# Altium PCB Micron-6.PcbDoc
Units mm, origin at the board's own origin, x right, y up, seen from the top; angles counter-clockwise.
Board outline 45.2 x 23.2 mm, 2 copper layers (Top Layer, Bottom Layer), stack 1.021 mm thick; 73 components, 55 nets, 245 pads, 114 vias.
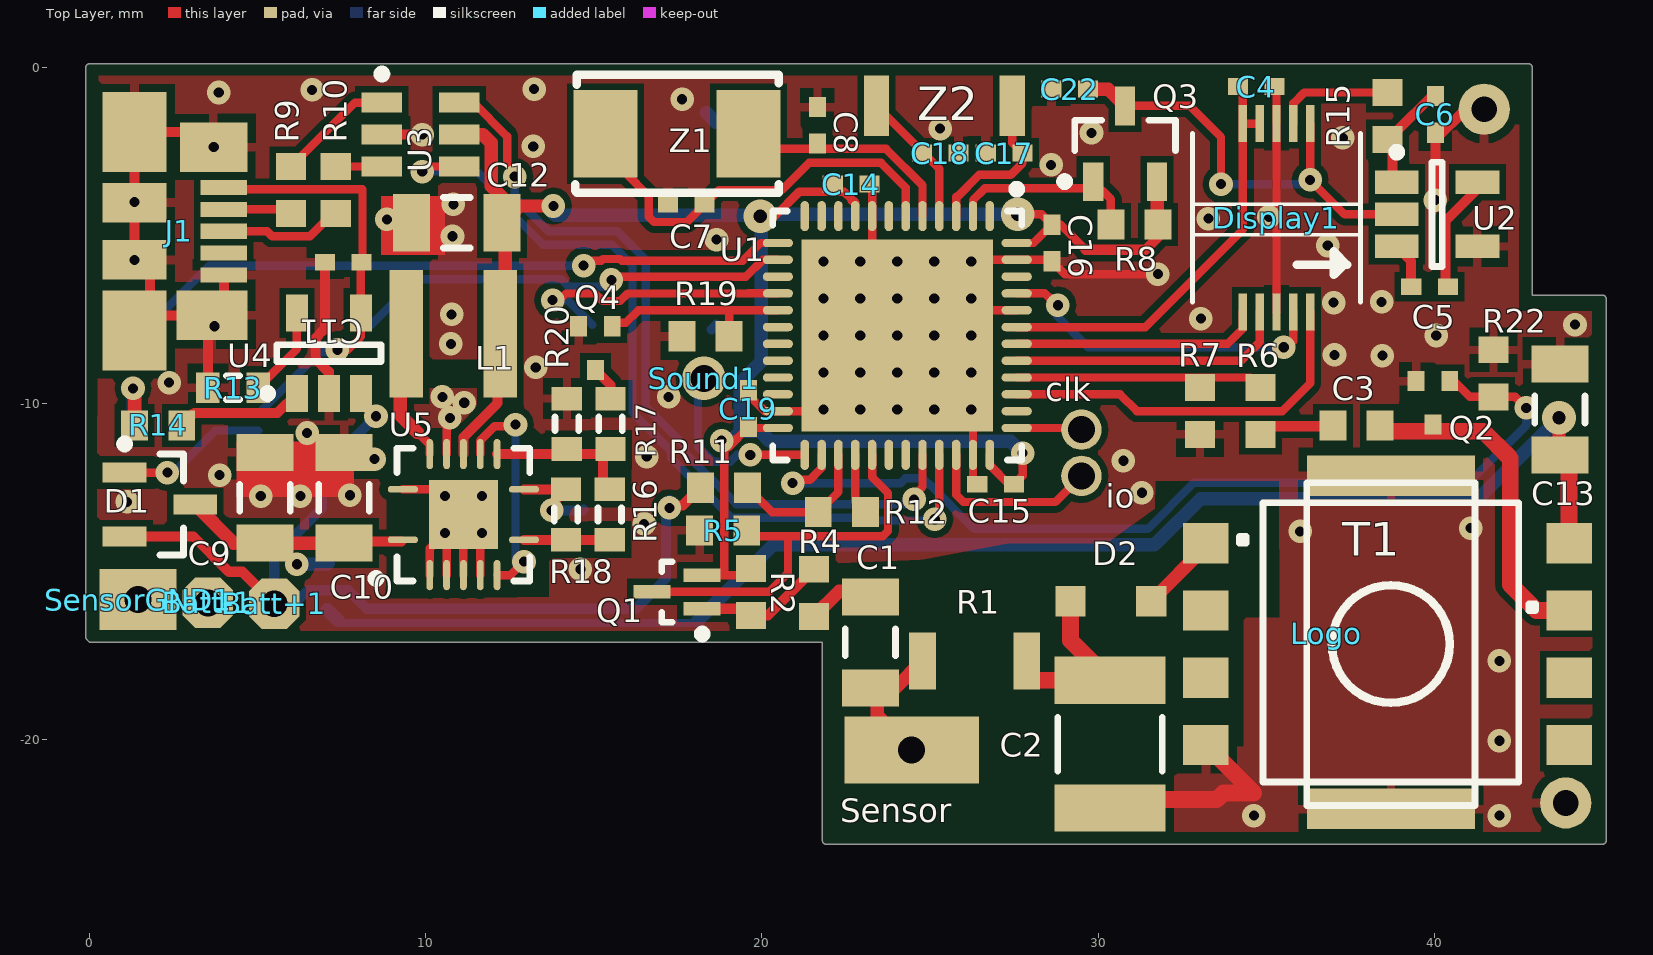
[diagram p0: Top Layer view]
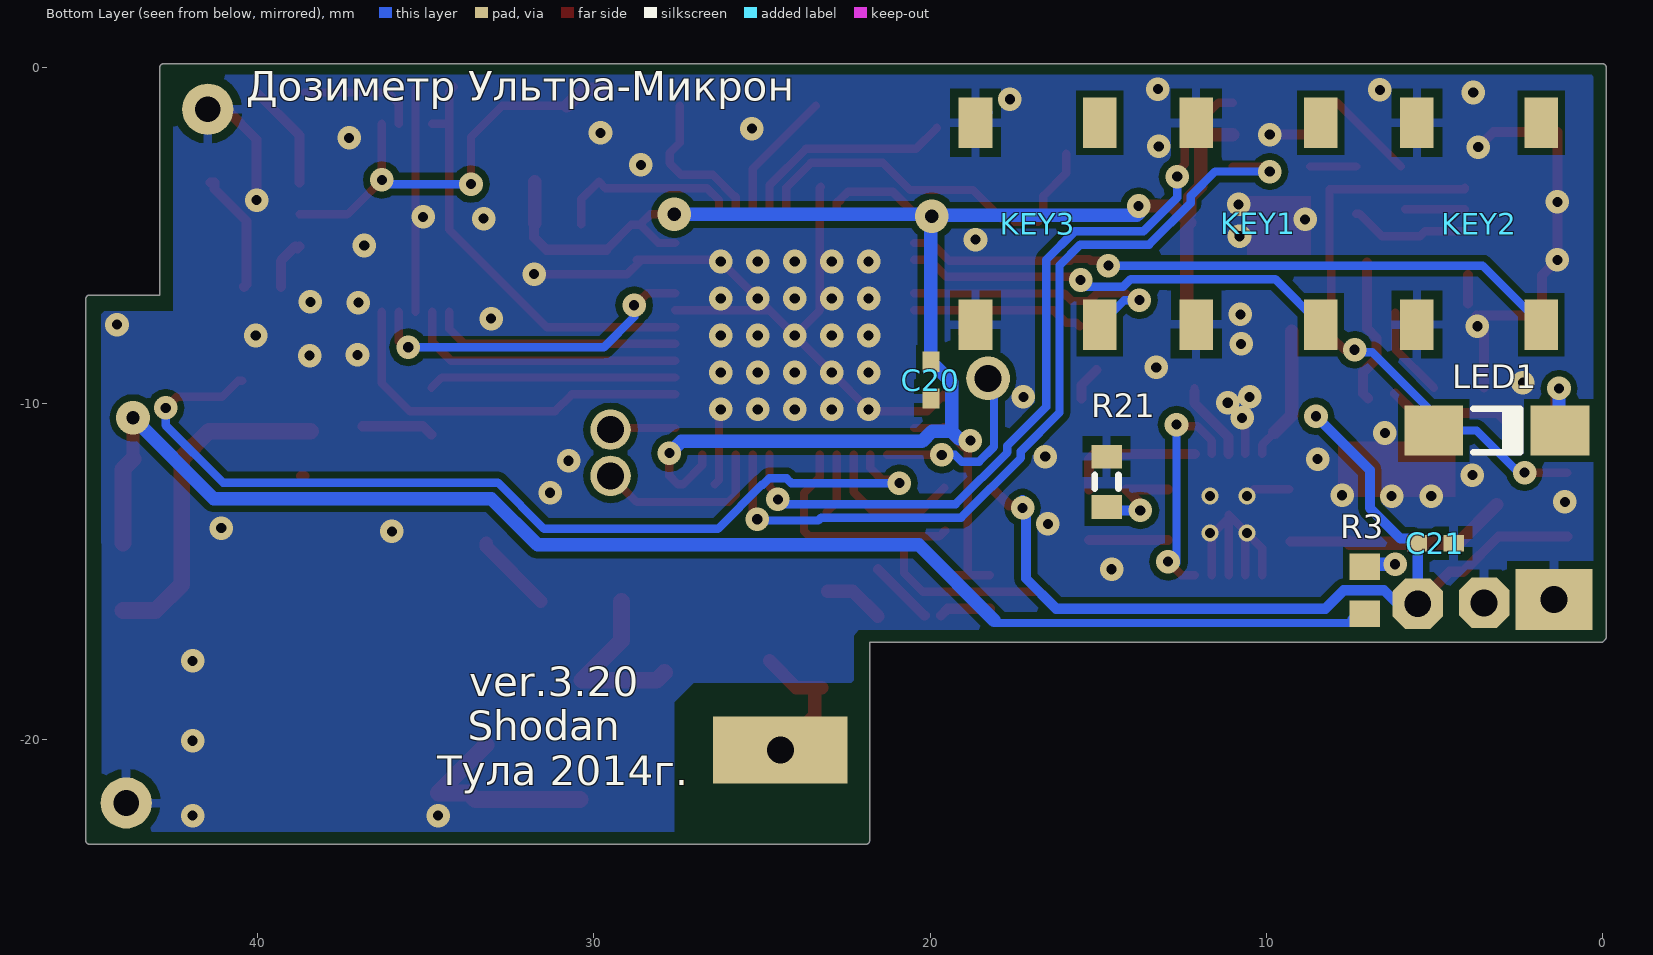
[diagram p1: Bottom Layer view, seen from below]

## Layer stack, top to bottom
Top Solder: solder mask 0.0102, Solder Resist, Dk 3.5
Top Layer: signal copper 0.0356
Dielectric1: dielectric 0.95, FR-4, Dk 4.8
Bottom Layer: signal copper 0.0356
Bottom Solder: solder mask 0.0102, Solder Resist, Dk 3.5

## Board outline
21.8,-23 21.8,-17.1 0.05,-17.1 cw(c0.05,-17) -0.021,-17.071 -0.071,-17.021 cw(c0,-16.95) -0.1,-16.95 -0.1,0 cw(c0,0) 0,0.1 42.775,0.1 cw(c42.775,0) 42.788,0.1 42.787,0.1 cw(c42.8,0) 42.9,0 42.9,-6.775 44.95,-6.775 cw(c44.95,-6.875) 44.975,-6.778 cw(c45,-6.875) 45.1,-6.875 45.1,-23 cw(c45,-23) 45,-23.1 21.9,-23.1 cw(c21.9,-23)

## Design rules (kind name [scope] priority, off if disabled: settings)
Clearance Clearance_poly [InPolygon] p1: gap=0.2
Clearance [All] p2: gap=0.15
ComponentClearance [All] p1: gap=0.1 collisioncheckmode=3 verticalgap=0.254 showdistances=TRUE
HoleSize [All] p1: absolutevalues=TRUE maxlimit=2.54 minlimit=0.3 maxpercent=80.000 minpercent=20.000
HoleToHoleClearance [All] p1: gap=0.152 allowstackedmicrovias=TRUE
MinimumAnnularRing [All] p1: minimumring=0.2
MinimumSolderMaskSliver [All] p1: minsoldermaskwidth=0.152
PlaneClearance [All] p1: clearance=2
PlaneConnect [All] p1: planeconnectstyle=Relief reliefexpansion=0.457 reliefentries=4 reliefconductorwidth=0.3 reliefairgap=0.457
PolygonConnect PolygonConnect_via [IsVia] p1: connectstyle=Direct reliefconductorwidth=0.254 reliefentries=4 polygonreliefangle="90 Angle" airgapwidth=0.254
PolygonConnect [All] p2: connectstyle=Relief reliefconductorwidth=0.254 reliefentries=4 polygonreliefangle="90 Angle" airgapwidth=0.254
RoutingVias [All] p1: holewidth=0.3 width=0.62 viastyle="Through Hole" minholewidth=0.3 minwidth=0.62 maxholewidth=6 maxwidth=4
ShortCircuit ShortCircuit_1 [All] p1: allowed=FALSE
ShortCircuit [All] p2: allowed=FALSE
SilkToSilkClearance [All] p1: silktosilkclearance=0.152
SilkToSolderMaskClearance SilkscreenOverComponentPads [IsPad] p1: minsilkscreentomaskgap=0.1 clearancetoexposedcopper=TRUE
SolderMaskExpansion [All] p1: expansion=0.1
UnpouredPolygon [All] p1: allowunpoured=FALSE
Width [All] p1: maxlimit=2.254 minlimit=0.25 preferedwidth=0.4
20 further rules are at their usual default settings.

## Components (designator, comment, footprint, x,y, rotation, side; value= is the part's Value field where it differs from the comment)
Batt+1 "" "Sensor contact"#1 5.125,-17.725 r90 top
Batt-1 "" "Sensor contact"#2 3.525,-15.925 r90 top
C1 "10pF" C1206 23.225,-17.1 r270 top
C2 "10nF 1000V" 1812 30.35,-20.125 r90 top
C3 "100nF" 1608[0603] 37.675,-10.65 r0 top
C4 "100nF" "0402 AVX" 34.7,-0.575 r90 top
C5 "1uF" "0402 AVX" 39.85,-6.525 r270 top
C6 "1uF" "0402 AVX" 40.025,-1.4 r180 top
C7 "18pF" "0402 AVX" 17.75,-4.075 r90 top
C8 "18pF" "0402 AVX" 21.65,-1.725 r180 top
C9 "4u7" C1206 5.225,-12.8 r270 top
C10 "100nF" C1206 7.575,-12.8 r270 top
C11 "1uF" "0402 AVX" 7.55,-5.8 r90 top
C12 "22uF" C1206 10.925,-4.625 r0 top
C13 "10uF" C1206 43.725,-10.175 r270 top
C14 "100nF" "0402 AVX" 22.65,-3.475 r90 top
C15 "100nF" "0402 AVX" 26.95,-12.4 r270 top
C16 "100nF" "0402 AVX" 28.625,-5.225 r0 top
C17 "10pF" "0402 AVX" 27.2,-2.55 r90 top
C18 "10pF" "0402 AVX" 25.3,-2.55 r270 top
C19 "100nF" "0402 AVX" 19.6,-10.15 r180 top
C20 "1uF" "0402 AVX" 19.975,-9.3 r180 bottom
C21 "1uF" "0402 AVX" 4.975,-14.15 r270 bottom
C22 "100nF" "0402 AVX" 29.15,-0.65 r270 top
clk "" "Sensor contact"#3 29.5,-10.775 r90 top
D1 "PMEG4005CT" SOT23_N 2.1,-13 r0 top
D2 "DA2JF8100L" DA2JF8100L 31.575,-15.875 r180 top
Display1 "Nokia 2760" DF23C-10DS-0.5V 32.8,-1.875 r90 top locked
io "" "Sensor contact"#3 29.5,-12.15 r90 top
J1 "Micro-USB" 47346-0001 4.75,-4.875 r270 top
KEY1 "Menu" IT-1187-160GM-G 12.087,-1.65 r270 bottom locked
KEY2 "UP" IT-1187-160GM-G 5.525,-1.65 r270 bottom locked
KEY3 "DOWN" IT-1187-160GM-G 18.65,-1.65 r270 bottom locked
L1 "10uH" IFSC1515AHER100M01 12.725,-9.825 r180 top
LED1 "KPTD-3216SECK" KPTD-3216SECK 3.15,-10.8 r0 bottom
Logo "" "Logo Micron" 36.775,-16.85 r0 top
Q1 "BC857CT" SOT416_N 17.475,-15.6 r180 top
Q2 "PMR400UN" PMR400UN 39.95,-9.325 r90 top
Q3 "IRLML6401" Micro3_N 30.8,-2.275 r90 top
Q4 "PMR400UN" PMR400UN 15.05,-7.7 r90 top
R1 "10M" "Yageo HV 1206" 26.325,-17.65 r0 top
R2 "10k" 1608[0603] 19.675,-15.6 r270 top
R3 "22R" 1608[0603] 7.075,-15.55 r270 bottom
R4 "1.5K" 1608[0603] 21.55,-15.625 r90 top
R5 "10k" 1608[0603] 18.85,-13.775 r180 top
R6 "10k" 1608[0603] 34.825,-10.225 r90 top
R7 "1k" 1608[0603] 33.025,-10.225 r90 top
R8 "10k" 1608[0603] 31.075,-4.675 r0 top
R9 "22R" 1608[0603] 6,-3.65 r270 top
R10 "22R" 1608[0603] 7.325,-3.65 r270 top
R11 "10K" 1608[0603] 18.875,-12.5 r180 top
R12 "10K" 1608[0603] 22.375,-13.225 r180 top
R13 "62K" J1-0603 4.275,-9.525 r0 top
R14 "470R" 1608[0603] 2.05,-10.65 r180 top
R15 "22R" 1608[0603] 38.6,-1.45 r270 top
R16 "1.6M" J1-0603 15.475,-13.3 r90 top
R17 "1.6M" J1-0603 15.5,-10.6 r270 top
R18 "3M" J1-0603 14.175,-13.3 r270 top
R19 "100k" 1608[0603] 18.325,-8 r0 top
R20 "3.3M" J1-0603 14.2,-10.6 r90 top
R21 "2.2M" J1-0603 14.75,-12.325 r90 bottom
R22 "100k" 1608[0603] 41.75,-9.1 r90 top
Sensor "" "Sensor contact"#4 24.45,-20.3 r180 top
SensorGND1 "" "Sensor contact"#5 1.45,-15.825 r180 top
Sound1 "" "Sensor contact"#6 18.275,-9.25 r90 top
T1 "Epcos ER9.5/5 10, d0.150 / 300, d0.063" "Epcos ER9.5/5" 33.2,-20.15 r0 top
U1 "STM32L152CBU6" UFQFPN48_M 24.025,-7.975 r270 top
U2 "TPS60400DBV" SOT-23-OT5_M 40.075,-4.375 r0 top
U3 "USBLC6-2" SOT23-6L 9.85,-2 r0 top
U4 "MCP73831T-2ACI/OT" SOT-23-OT5_N 7.125,-8.5 r90 top
U5 "TPS62736RGYT" TPS62736RGYT 11.125,-13.3 r0 top
Z1 "8MHZ" 8MHZ 16.9,-1.875 r180 top
Z2 "32,768 KHz" ABS10 22.975,-0.25 r0 top

## Footprints (in the part's own frame and the unit in brackets; to place one, negate y for a bottom-side part, rotate by r counter-clockwise, add the part's x,y. Pads: shape width x height; smd on the part's side, far side on the other; paste and mask are expansions set on the pad)
8MHZ [mm]
  rect 1.9x2.6 smd: 1(-2.7,0.1) 2(1.55,0.1)
  silkscreen extent -3.6,-1.65 2.45,1.85, body extent -3.6,-1.65 2.4,1.85, height 1.4
"0402 AVX" [mm]
  rect 0.5x0.6 smd: 1(0,0.545) 2(0,-0.545)
  body extent -0.25,-0.48 0.25,0.52, height 0.56
1608[0603] [mm] "Chip Capacitor, Body 1.6x0.8mm, IPC High Density"
  rect 0.8x0.9 smd: 1(-0.7,0) 2(0.7,0)
  body extent -0.87,-0.48 0.87,0.48, height 1.3
1812 [mm] "Chip Capacitor, Body 4.5x3.2mm, IPC High Density"
  rect 1.4x3.3 smd: 1(-1.9,0) 2(1.9,0)
  silkscreen extent -0.8,-1.55 0.8,1.55, body extent -2.4,-1.7 2.4,1.7, height 1.4
47346-0001 [mm] "Molex Mico-USB"
  rect 0.45x1.38 smd: 1(-1.3,-0.75) 2(-0.65,-0.75) 3(0,-0.75) 4(0.65,-0.75) 5(1.3,-0.75)
  rect 1.475x2 smd: MH1(-2.5,-1.05)
  rect 1.475x2.1 smd: MH2(2.5,-1.1)
  rect 2.375x1.9 smd: MH3(-2.95,-3.4) MH4(2.95,-3.4)
  rect 1.175x1.9 smd: MH3(-0.85,-3.4) MH4(0.85,-3.4)
  body extent -3.95,-5.52 4.03,-0.09, height 2.77
ABS10 [mm]
  rect 0.75x1.8 smd: 1(0.43,-0.9) 2(4.47,-0.9)
  body extent 0,-1.8 4.9,0, height 1
C1206 [mm] "Chip Capacitor, Body 3.2x1.6mm, IPC High Density"
  rect 1.1x1.7 smd: 1(-1.35,0) 2(1.35,0)
  silkscreen extent -0.4,-0.75 0.4,0.75, body extent -1.7,-0.9 1.7,0.9, height 1.3
DA2JF8100L [mm]
  rect 0.9x0.9 smd: 1(0,0) 2(2.4,0)
  body extent 0.36,-0.65 2.06,0.6, height 0.7
DF23C-10DS-0.5V [mm]
  rect 1.1x0.25 smd: 1(-5.4,-1.5) 2(-5.4,-2) 3(-5.4,-2.5) 4(-5.4,-3) 5(-5.4,-3.5) 6(0.2,-3.5) 7(0.2,-3) 8(0.2,-2.5) 9(0.2,-2) 10(0.2,-1.5)
  silkscreen extent -5.1,-5 -0.1,0, body extent -5.1,-5 -0.1,0, height 1.4
"Epcos ER9.5/5" [mm]
  rect 1.35x1.2 smd: 1(0,6) 2(0,4) 3(0,2) 4(0,0) 5(10.8,6) 6(10.8,4) 7(10.8,2) 8(10.8,0)
  rect 5x1.2 smd: GND(5.5,-1.9) GND(5.5,8)
  silkscreen extent 1,-1.8 9.8,7.8, body extent -0.4,-1.2 11.2,7.3, height 4.45
IFSC1515AHER100M01 [mm]
  rect 1x3.8 smd: 1(0.5,-1.9) 2(3.3,-1.9)
  body extent 0,-3.8 3.8,0, height 1.8
IT-1187-160GM-G [mm]
  rect 1.5x1 smd: 3(0,0) 3(6,0) 4(0,3.7) 4(6,3.7)
  body extent 0.4,-0.7 5.6,4.5, height 1.5
J1-0603 [mm] "Chip Resistor, Body 1.6x0.8mm, IPC High Density"
  rect 0.7x0.9 smd: 1(-0.75,0) 2(0.75,0)
  silkscreen extent -0.2,-0.35 0.2,0.35, body extent -0.85,-0.48 0.85,0.48, height 0.9
KPTD-3216SECK [mm] "Chip Capacitor, 2-Leads, Body 3,2x1,6mm, IPC Medium Density"
  rect 1.75x1.5 smd: 1(-1.875,0) 2(1.875,0)
  silkscreen extent -0.7,-0.65 0.7,0.65, body extent -1.6,-0.8 1.6,0.8, height 1.8
"Logo Micron" [mm]
Micro3_N [mm] "SOT23, 3-Leads, Body 2.9x1.3mm, Pitch 0.95mm, Lead Span 2.3mm, IPC Medium Density"
  rect 1.15x0.6 smd: 1(-1.125,0.95) 2(-1.125,-0.95) 3(1.125,0)
  silkscreen extent -1.25,-1.5 0.7,1.92, body extent -0.7,-1.5 0.7,1.5, height 1.12
PMR400UN [mm]
  rect 0.6x0.5 smd: 1(0,-0.5) 2(0,0.5) 3(-1.3,0)
  body extent -1.15,-0.9 -0.25,0.9, height 0.95
"Sensor contact"#1 [mm]
  oct 1.5x1.5 hole 0.8: 1(1.775,-0.375)
"Sensor contact"#2 [mm]
  oct 1.5x1.5 hole 0.8: 1(0,0)
"Sensor contact"#3 [mm]
  round 1.2 hole 0.8: 1(0,0)
"Sensor contact"#4 [mm]
  rect 4x2 hole 0.8: 1(0,0)
"Sensor contact"#5 [mm]
  rect 2.3x1.8 hole 0.8: 1(0,0)
"Sensor contact"#6 [mm]
  round 1.3 hole 0.8: 1(0,0)
SOT23-6L [mm]
  rect 1.2x0.6 smd: 1(-1.15,0.95) 2(-1.15,0) 3(-1.15,-0.95) 4(1.15,-0.95) 5(1.15,0) 6(1.15,0.95)
  silkscreen extent -1.27,1.68 -1.02,1.92, body extent -0.75,-1.52 0.75,1.53, height 1.45
SOT23_N [mm] "SOT23, 3-Leads, Body 2.9x1.3mm, Pitch 0.95mm, Lead Span 2.3mm, IPC Medium Density"
  rect 1.3x0.6 smd: 1(-1.05,0.95) 2(-1.05,-0.95) 3(1.05,0)
  silkscreen extent -1.17,-1.5 0.7,1.92, body extent -0.7,-1.5 0.7,1.5, height 1.1
SOT416_N [mm] "SOT416, 3-Leads, Body 1.6x0.8mm, Pitch 0.50mm, Lead Span 1.6mm, IPC Medium Density"
  rect 1.1x0.4 smd: 1(-0.75,0.5) 2(-0.75,-0.5) 3(0.75,0)
  silkscreen extent -0.87,-0.9 0.45,1.37, body extent -0.45,-0.9 0.45,0.9, height 0.95
SOT-23-OT5_M [mm] "SOT23, 5-Leads, Body 2.9x1.6mm, Pitch 0.95mm, Lead Span 2.7mm, IPC Low Density"
  rect 1.3x0.7 smd: 1(-1.2,0.95) 2(-1.2,0) 3(-1.2,-0.95) 4(1.2,-0.95) 5(1.2,0.95)
  silkscreen extent -1.32,-1.55 0.15,1.97, body extent -0.9,-1.55 0.9,1.55, height 1.45
SOT-23-OT5_N [mm] "SOT23, 5-Leads, Body 2.9x1.6mm, Pitch 0.95mm, Lead Span 2.7mm, IPC Medium Density"
  rect 1.1x0.65 smd: 1(-1.2,0.95) 2(-1.2,0) 3(-1.2,-0.95) 4(1.2,-0.95) 5(1.2,0.95)
  silkscreen extent -1.32,-1.55 0.25,1.95, body extent -0.9,-1.55 0.9,1.55, height 1.45
TPS62736RGYT [mm] "QFN, 18-Leads, Body 3,50x3,50mm, Pitch 0,50mm, Thermal Pad 2,05x2,05mm, IPC Low Density"
  oval 0.9x0.2 smd: 1(-1.8,-0.75) 7(1.8,-0.75) 8(1.8,0.75) 14(-1.8,0.75)
  oval 0.2x0.9 smd: 2(-1,-1.8) 3(-0.5,-1.8) 4(0,-1.8) 5(0.5,-1.8) 6(1,-1.8) 9(1,1.8) 10(0.5,1.8) 11(0,1.8) 12(-0.5,1.8) 13(-1,1.8)
  rect 2.05x2.05 smd: 15(0,0)
  silkscreen extent -2.72,-2.02 1.97,1.97, body extent -1.83,-1.83 1.83,1.83, height 1
UFQFPN48_M [mm] "QFN, 48-Leads, Body 7x7mm, Pitch 0.5mm, Thermal Pad 5.6x5.6mm, IPC Low Density"
  oval 0.9x0.25 smd: 1(-3.55,2.75) 2(-3.55,2.25) 3(-3.55,1.75) 4(-3.55,1.25) 5(-3.55,0.75) 6(-3.55,0.25) 7(-3.55,-0.25) 8(-3.55,-0.75) 9(-3.55,-1.25) 10(-3.55,-1.75) 11(-3.55,-2.25) 12(-3.55,-2.75) 25(3.55,-2.75) 26(3.55,-2.25) 27(3.55,-1.75) 28(3.55,-1.25) 29(3.55,-0.75) 30(3.55,-0.25) 31(3.55,0.25) 32(3.55,0.75) 33(3.55,1.25) 34(3.55,1.75) 35(3.55,2.25) 36(3.55,2.75)
  oval 0.25x0.9 smd: 13(-2.75,-3.55) 14(-2.25,-3.55) 15(-1.75,-3.55) 16(-1.25,-3.55) 17(-0.75,-3.55) 18(-0.25,-3.55) 19(0.25,-3.55) 20(0.75,-3.55) 21(1.25,-3.55) 22(1.75,-3.55) 23(2.25,-3.55) 24(2.75,-3.55) 37(2.75,3.55) 38(2.25,3.55) 39(1.75,3.55) 40(1.25,3.55) 41(0.75,3.55) 42(0.25,3.55) 43(-0.25,3.55) 44(-0.75,3.55) 45(-1.25,3.55) 46(-1.75,3.55) 47(-2.25,3.55) 48(-2.75,3.55)
  rect 5.7x5.7 smd: 49(0,0)
  silkscreen extent -4.47,-3.7 3.7,3.7, body extent -3.55,-3.55 3.55,3.55, height 0.6
"Yageo HV 1206" [mm]
  rect 0.8x1.7 smd: 1(-1.55,0) 2(1.55,0)
  body extent -1.6,-0.8 1.5,0.8, height 0.6

## Part data
Batt+1 Batt-1 clk io Logo Sensor SensorGND1 Sound1: library part Plug, "Plug"
C1 C2 C3 C4 C5 C6 C7 C8 C11 C13 C14 C15 C16 C17 C18 C19 C20 C21 C22: library part "Cap Semi", "Capacitor (Semiconductor SIM Model)"
C9 C10 C12: library part CAPACITOR, "Capacitor (Semiconductor SIM Model)"
D1: library part BAT54C, "Schottky Barrier Double Diode"
D2: library part Diode, "Default Diode"
J1: library part 0481900001, "USB On-The-Go (OTG) Mini-B Receptacle, Right Angle, SMT, 0.80mm (.031\") Pitch, Solder Tabs with Back Cover, Recessed Type"
KEY1 KEY2 KEY3: library part Micro_key_smd
L1: library part Inductor, "Inductor"
Q1: "PNP General-purpose Transistor"
Q2 Q4: library part IRLML2402, "HEXFET Power MOSFET"
Q3: "HEXFET Power MOSFET"
R1 R2 R3 R4 R5 R6 R7 R8 R9 R10 R11 R12 R15 R19 R22: library part "Resistor 0805"
R13 R14 R16 R17 R18 R20 R21: library part Res3, "Resistor"
T1: library part "Epcos ER9.5/5"
U2: library part TPS60400
U4: "Miniature Single-Cell, Fully Integrated Li-Ion, Li-Polymer Charge Management Controller, 4.2V, 5-Pin SOT-23, Industrial Temperature, Tape and Reel"
Z2: library part 8MHZ

## Free pads (board coordinates)
  round 1.524 hole 0.762: 0(41.475,-1.25) 0(43.9,-21.875)

## Via types
v1: diameter 0.7, hole 0.3, Top Layer to Bottom Layer, tented both sides, 107 vias
v2: diameter 0.5, hole 0.3, Top Layer to Bottom Layer, tented both sides, 4 vias
v3: diameter 1, hole 0.4, Top Layer to Bottom Layer, tented both sides, 3 vias

## Nets (pads, with @x,y where several pads share a name; then routed paths per layer and width w, separated by ;. In a path a pad name is that pad's centre, name@x,y a point inside that pad or via, vN(x,y) a via of type N, cw(c..) or ccw(c..) an arc to the next point about the centre after c; other vN are vias at no path point)
+3V: C12.2 C14.1 C15.1 C16.1 C19.1 C20.1 L1.1 Q1.2 Q3.2 R2.1 R8.2 U1.9 U1.24 U1.36 U1.48 U3.5 U5.11 | length 61.3
  Top Layer w0.25: L1.1@12.137,-9.646 L1.1@12.137,-9.537 ; Q1.2 18.9,-15.1 ; v1@18.875,-11.42 18.875,-15.075 18.9,-15.1 ; v1@18.998,-11.297 C19.1 19.63,-10.725 U1.24 ; R2.1 19.475,-15.1 18.9,-15.1 ; v3(19.95,-4.425) 20.384,-4.425 21.109,-3.7 22.441,-3.7 22.675,-3.934 22.675,-3.967 22.722,-3.967 22.775,-4.02 U1.9 ; U1.36 26.775,-11.831 27.344,-12.4 C15.1 27.75,-12.145 v1(27.75,-11.475) ; U1.48 28.08,-5.225 C16.1 ; v3(27.601,-4.375) 28.32,-4.375 C16.1 ; 29.626,-5.425 28.881,-4.68 C16.1
  Top Layer w0.3: U5.11 11.125,-10.999 12.137,-9.986 L1.1@12.137,-9.646 ; 29.626,-5.425 31.408,-5.425 31.775,-5.058 R8.2
  Top Layer w0.4: U3.5 11.7,-2 11.951,-2.251 11.951,-3.54 12.275,-3.864 C12.2@12.275,-4.325 ; C12.2 12.775,-4.125 v1(13.8,-4.125) ; L1.1@12.375,-7.925 C12.2@12.375,-4.725 ; R8.2@31.75,-4.645 Q3.2
  Bottom Layer w0.4: v1(13.8,-4.125) 13.8,-4.35 13.85,-4.4 19.925,-4.4 v3(19.95,-4.425) ; v1(18.801,-11.101) 18.85,-11.052 19.137,-11.052 19.362,-10.827 ; v3(27.601,-4.375) 20,-4.375 v3(19.95,-4.425) ; v1(27.75,-11.475) 27.4,-11.125 20.24,-11.125 19.942,-10.827 19.362,-10.827 ; 19.362,-10.827 19.362,-9.368 C20.1 19.975,-4.45 v3(19.95,-4.425)
+5: C11.2 D1.1 J1.1 LED1.2 U4.4 | length 16.9
  Top Layer w0.25: D1.1@1.051,-12.051 v1(2.325,-12.051) ; J1.1@4.1,-3.575 4.1,-3.625 8.125,-3.625 8.125,-5.9 8.05,-5.975 8.075,-6 U4.4 8.075,-8.005 7.68,-8.4 v1(7.375,-8.4)
  Bottom Layer w0.25: v1(2.325,-12.051) 2.499,-12.051 3.75,-10.8 LED1.2 ; LED1.2@5.075,-10.25 6.85,-8.475 7.301,-8.475 v1(7.375,-8.4)
+400V: C2.2 D2.2 R1.2 | length 5.4
  Top Layer w0.5: R1.2@27.9,-18 28.125,-18.225 C2.2 29.175,-17.05 D2.2
+DATA: J1.3 R10.2 | length 3.6
  Top Layer w0.25: J1.3@4.1,-4.875 5.286,-4.875 5.436,-5.025 6.564,-5.025 7.239,-4.35 R10.2
+LED: C22.1 Display1.6 Q3.3 U2.2 | length 13.2
  Top Layer w0.25: Q3.3 32.725,-1.15 33.65,-2.075 v1(33.65,-3.475) ; Display1.6 v1(36.3,-3.35) 37.325,-4.375 U2.2@38.75,-4.375
  Top Layer w0.4: C22.1 30.3,-0.65 Q3.3
  Bottom Layer w0.25: v1(33.65,-3.475) 36.175,-3.475 v1(36.3,-3.35)
-3V: Display1.7 R15.1 | length 3.5
  Top Layer w0.25: Display1.7 35.8,-1.075 36.125,-0.75 R15.1
-DATA: J1.2 R9.2 | length 1.8
  Top Layer w0.25: J1.2@4.1,-4.225 R9.2@5.875,-4.225
CLK: clk.1 U1.37 | length 1.9
  Top Layer w0.25: U1.37 29.45,-10.725 clk.1
GND: Batt-1.1 C2.1 C4.2 C6.1 C7.1 C8.2 C9.1 C10.1 C11.1 C12.1 C13.1 C14.2 C15.2 C16.2 C17.1 C18.1 C19.2 C20.2 C21.1 C22.2 Display1.3 Display1.8 J1.5 J1.MH1 J1.MH2 J1.MH3 J1.MH4 KEY1.3 KEY2.3 KEY3.3 pad.0 Q2.2 Q4.2 R5.2 R7.1 R13.1 R19.1 R20.2 R21.2 R22.2 SensorGND1.1 T1.4 T1.GND U1.8 U1.23 U1.35 U1.44 U1.47 U1.49 U2.4 U3.2 U4.2 U5.2 U5.3 U5.4 U5.5 U5.12 U5.14 U5.15 | length 70.9
  Top Layer w0.25: U5.14 10.375,-12.55 v2(10.575,-12.75) ; U5.2 10.125,-14.3 v2(10.575,-13.85) ; U5.3 10.625,-13.8 U5.15 U5.15@11.125,-13.4 ; U5.12 v1@10.625,-10.525 ; U5.4 11.125,-14.35 U5.15@11.125,-13.4 ; U5.15@11.45,-13.725 U5.15@11.125,-13.4 ; U5.5 11.625,-13.9 v2(11.675,-13.85) ; C19.2@19.6,-9.806 19.6,-9.741 20.084,-10.225 U1.23 21.775,-10.225 v1(21.825,-10.175) v1(22.925,-9.075) v1(24.025,-7.975) ; C14.2@23.245,-3.55 23.275,-3.58 U1.8 23.275,-7.225 v1(24.025,-7.975) ; U1.49@26.275,-10.225 U1.35 26.275,-12.27 C15.2 ; U1.44 U1.49@24.775,-7.225 ; C16.2 29.005,-6.15 v1(31.775,-6.15) ; C16.2@28.725,-5.725 U1.47 26.275,-5.725 v1(26.225,-5.775) v1(25.125,-6.875) U1.49@24.775,-7.225 ; C4.2 35.3,-0.63 Display1.8 35.3,-4.225 v1(35.075,-4.45) 35.3,-4.675 Display1.3 ; v1(24.025,-7.975) U1.49@24.775,-7.225
  Top Layer w0.3: R13.1 3.525,-7.6 J1.MH2@3.75,-7.375 ; J1.MH2 1.8,-7.375 1.8,-6.175 v1(1.35,-5.725) 1.35,-4.025 1.35,-1.925 3.25,-1.925 v1(3.7,-2.375) ; J1.MH2@4,-7.025 J1.5 ; U4.2@6.975,-9.85 U4.2 7.125,-9.05 7.106,-9.05 6.725,-8.67 6.725,-8.049 7.005,-7.769 C11.1 ; U3.2 v1(9.9,-2) ; T1.GND@38.601,-12.15 T1.GND@38.7,-12.15 ; v1(40.025,-3.95) 40.025,-2.15 pad.0@40.925,-1.25
  Top Layer w0.4: SensorGND1.1@0.8,-15.175 SensorGND1.1@2.275,-15.175
  Top Layer w0.5: C2.1@30.4,-21.775 33.525,-21.775 33.725,-21.575 34.625,-21.575 T1.4
  Bottom Layer w0.3: KEY3.3@18.5,-7.8 KEY3.3@18.65,-7.65
  Bottom Layer w0.4: KEY3.3@18.345,-1.345 KEY3.3@18.65,-1.65
  other v1: 34.625,-22.25 41.925,-22.25 41.925,-20.025 41.925,-17.65 14.6,-14.925 36,-13.8 41.075,-13.7 16.5,-13.575 1.125,-12.925 5.1,-12.75 6.275,-12.75 7.75,-12.725 31.3,-12.65 3.875,-12.125 30.75,-11.7 8.475,-11.65 16.575,-11.575 6.475,-10.875 10.725,-10.425 22.925,-10.175 24.025,-10.175 25.125,-10.175 26.225,-10.175 11.15,-9.975 10.5,-9.8 17.225,-9.8 2.375,-9.375 21.825,-9.075 24.025,-9.075 25.125,-9.075 26.225,-9.075 13.275,-8.925 38.45,-8.575 37.025,-8.55 10.75,-8.225 21.825,-7.975 22.925,-7.975 25.125,-7.975 26.225,-7.975 40.05,-7.975 3.725,-7.7 44.175,-7.65 33.05,-7.475 10.775,-7.35 37,-7 38.425,-6.975 21.825,-6.875 22.925,-6.875 24.025,-6.875 26.225,-6.875 21.825,-5.775 22.925,-5.775 24.025,-5.775 25.125,-5.775 36.825,-5.3 18.65,-5.125 10.8,-5.025 8.85,-4.525 33.275,-4.5 10.825,-4.075 1.35,-4 28.6,-2.9 13.2,-2.35 37.275,-2.1 29.8,-1.95 25.3,-1.825 17.625,-0.95 3.85,-0.75 6.625,-0.675 13.225,-0.65
  other v2: 11.675,-12.75
IO: io.1 U1.34 | length 5.3
  Top Layer w0.25: U1.34 25.775,-12.709 25.991,-12.925 28.725,-12.925 io.1
NetBatt+1_1: Batt+1.1 C21.2 D1.2 R11.2 U4.3 | length 28.2
  Top Layer w0.3: D1.2 3.099,-13.95 4.149,-15 4.55,-15 Batt+1.1 ; v1(17.251,-13.101) 17.326,-13.025 17.65,-13.025 R11.2
  Bottom Layer w0.3: v1(8.525,-10.376) 6.925,-11.976 6.925,-13.107 6.016,-14.016 5.654,-14.016 C21.2 5.5,-14.17 Batt+1.1 6.101,-15.95 6.501,-15.55 7.7,-15.55 8.25,-16.1 16.25,-16.1 17.15,-15.2 v1@17.15,-13.101 ; v1(17.251,-13.101) v1@17.251,-12.874
NetC1_1: C1.1 R4.1 | length 1.8
  Top Layer w0.4: R4.1 22.3,-15.575 C1.1@23.05,-15.575
NetC1_2: C1.2 R1.1 Sensor.1 | length 4.2
  Top Layer w0.4: C1.2 23.975,-18.45 R1.1 ; C1.2@23.425,-18.5 23.425,-19.275 Sensor.1 Sensor.1@24.5,-20.25
NetC3_1: C3.1 R6.1 | length 2.2
  Top Layer w0.3: R6.1 35.075,-10.675 C3.1@36.875,-10.675
NetC3_2: C3.2 Q2.3 T1.6 | length 10
  Top Layer w0.5: C3.2@38.425,-10.825 41.45,-10.825 42.25,-11.625 42.25,-15.375 43.025,-16.15 T1.6
NetC4_1: C4.1 Display1.9 Display1.10 U1.43 | length 12.7
  Top Layer w0.25: U1.43 31.4,-7.725 34.3,-4.825 Display1.10 ; C4.1 34.3,-0.72 Display1.10 ; Display1.9 Display1.10
NetC5_1: C5.1 U2.5 | length 3.6
  Top Layer w0.3: C5.1 40.325,-6.455 40.325,-4.569 41.275,-3.619 U2.5 U2.5@41.4,-3.425
NetC5_2: C5.2 U2.3 | length 1.5
  Top Layer w0.3: U2.3@38.75,-5.325 U2.3@38.812,-5.387 ; U2.3 39.305,-5.755 C5.2
NetC6_2: C6.2 R15.2 U2.1 | length 3.2
  Top Layer w0.3: U2.1@38.75,-3.425 38.75,-2.025 C6.2@40.025,-0.75
NetC7_2: C7.2 U1.6 Z1.2 | length 11.7
  Top Layer w0.25: Z1.2@15.95,-2.575 15.95,-3.145 16.63,-3.825 16.63,-4.439 16.791,-4.6 17.77,-4.6 C7.2 18.72,-3.65 20.594,-3.65 21.399,-2.845 23.545,-2.845 24.275,-3.575 U1.6
NetC8_1: C8.1 U1.5 Z1.1 | length 6.6
  Top Layer w0.25: Z1.1@19.8,-1.8 20.425,-2.425 23.691,-2.425 24.775,-3.509 U1.5
NetC13_2: C13.2 R3.2 T1.5 | length 43.2
  Top Layer w0.4: C13.2@43.7,-11.65 v3(43.7,-10.425)
  Top Layer w0.5: C13.2@43.7,-11.65 44,-11.95 T1.5
  Bottom Layer w0.25: R3.2@7.4,-16.45 7.475,-16.525 18.016,-16.525 18.091,-16.45
  Bottom Layer w0.4: R3.2@7.075,-16.125 R3.2@7.4,-16.45 ; 18.091,-16.45 20.341,-14.2 31.672,-14.2 33.047,-12.825 41.3,-12.825 v3(43.7,-10.425)
NetC17_2: C17.2 U1.3 Z2.2 | length 4.8
  Top Layer w0.25: U1.3 25.775,-3.85 25.809,-3.85 26.459,-3.2 27.4,-3.2 27.745,-2.855 C17.2 27.445,-2.25 Z2.2
NetC18_2: C18.2 U1.4 Z2.1 | length 4
  Top Layer w0.25: Z2.1 25.275,-3.02 U1.4
NetD2_1: D2.1 T1.1 | length 2.4
  Top Layer w0.4: D2.1 33.2,-14.25 T1.1
NetDisplay1_1: Display1.1 U1.42 | length 7.4
  Top Layer w0.25: U1.42 33.848,-8.225 34.3,-7.773 Display1.1
NetDisplay1_2: Display1.2 U1.41 | length 8.4
  Top Layer w0.25: U1.41 34.25,-8.725 34.8,-8.175 Display1.2
NetDisplay1_4: Display1.4 U1.45 | length 9.7
  Top Layer w0.25: U1.45 28.415,-6.725 28.54,-6.85 28.575,-6.85 v1(28.8,-7.075) ; v1@35.8,-8.15 Display1.4
  Bottom Layer w0.25: v1(28.8,-7.075) 28.8,-7.425 29.7,-8.325 v1(35.517,-8.325)
NetDisplay1_5: Display1.5 U1.39 | length 11.4
  Top Layer w0.25: U1.39 30.65,-9.725 31.15,-10.225 35.475,-10.225 36.3,-9.4 Display1.5
NetKEY1_4: KEY1.4 U1.14 | length 13.1
  Top Layer w0.25: v1(15.526,-6.325) 15.626,-6.225 19.525,-6.225 20.025,-5.725 U1.14
  Bottom Layer w0.25: KEY1.4@8.387,-7.65 9.738,-6.3 14.034,-6.3 14.259,-6.525 15.326,-6.525 v1(15.526,-6.325)
NetKEY2_4: KEY2.4 U1.13 | length 19.7
  Top Layer w0.25: v1(14.7,-5.9) 14.85,-5.75 15.217,-5.75 15.267,-5.7 15.785,-5.7 15.834,-5.75 19.434,-5.75 19.959,-5.225 U1.13
  Bottom Layer w0.25: KEY2.4@1.825,-7.65 3.575,-5.9 14.2,-5.9 v1(14.7,-5.9)
NetKEY3_4: KEY3.4 U1.16 | length 8.7
  Top Layer w0.25: v1(13.775,-6.925) 13.775,-7.124 14.174,-6.725 15.042,-6.725 15.267,-6.95 15.785,-6.95 16.01,-6.725 19.59,-6.725 U1.16
  Bottom Layer w0.25: v1(13.775,-6.925) 14.225,-6.925 KEY3.4@14.95,-7.65
NetL1_2: L1.2 U5.13 | length 4
  Top Layer w0.25: 9.75,-10.85 10.125,-11.225 U5.13
  Top Layer w0.4: L1.2@9.25,-7.85 9.25,-10.35 9.75,-10.85
NetLED1_1: LED1.1 R14.2 | length 1.7
  Top Layer w0.4: v1(1.3,-9.55) 1.35,-9.6 R14.2@1.35,-10.475
  Bottom Layer w0.4: v1(1.3,-9.55) 1.3,-10.225 LED1.1@1.325,-10.25
NetQ1_1: Q1.1 R2.2 R4.2 | length 3.5
  Top Layer w0.3: Q1.1 19.475,-16.1 R2.2 ; 20.15,-16.3 20.175,-16.3 R4.2
NetQ1_3: Q1.3 R5.1 U1.29 | length 12.2
  Top Layer w0.25: Q1.3 20.214,-15.6 20.775,-15.039 20.775,-13.95 ; R5.1 19.725,-13.95 20.775,-13.95 ; U1.29 23.275,-12.186 23.75,-12.661 23.75,-13.789 23.589,-13.95 20.775,-13.95
NetQ2_1: Q2.1 R22.1 U1.26 | length 28.3
  Top Layer w0.25: v1@20.863,-12.266 21.425,-12.266 21.775,-11.916 U1.26 ; Q2.1 40.575,-9.325 41.05,-9.8 R22.1 42.4,-9.8 v1(42.725,-10.125)
  Bottom Layer w0.25: v1(20.913,-12.366) 24.127,-12.366 24.267,-12.226 24.785,-12.226 24.968,-12.409 ; 24.98,-12.396 26.309,-13.725 31.475,-13.725 32.85,-12.35 41.025,-12.35 42.725,-10.65 v1(42.725,-10.125)
NetQ3_1: Q3.1 R8.1 U1.2 | length 5.8
  Top Layer w0.25: U1.2 26.275,-3.95 26.625,-3.6 29.65,-3.6 Q3.1 30.375,-3.925 R8.1
NetQ4_1: Q4.1 R19.2 U1.17 | length 5.8
  Top Layer w0.25: Q4.1 15.65,-7.6 15.95,-7.6 16.325,-7.225 19.05,-7.225 ; R19.2@19.025,-7.925 19.025,-7.25 19.05,-7.225 ; U1.17 19.05,-7.225
NetQ4_3: Q4.3 R17.1 | length 1
  Top Layer w0.3: Q4.3 15.5,-9.45 R17.1
NetR6_2: R6.2 R7.2 U1.40 | length 7.4
  Top Layer w0.25: U1.40 34.525,-9.225 R6.2
NetR9_1: R9.1 U3.1 | length 3.5
  Top Layer w0.25: R9.1 7.9,-1.05 U3.1
NetR10_1: R10.1 U3.3 | length 1.4
  Top Layer w0.25: R10.1 U3.3
NetR11_1: R11.1 R12.2 U1.27 | length 4.3
  Top Layer w0.25: R11.1 20.3,-13.225 R12.2 22.275,-12.625 U1.27
NetR12_1: R12.1 U1.28 | length 1.8
  Top Layer w0.25: U1.28 22.775,-12.925 R12.1
NetR13_2: R13.2 U4.5 | length 2.7
  Top Layer w0.25: R13.2 6.175,-8.375 U4.5
NetR14_1: R14.1 U4.1 | length 3.8
  Top Layer w0.3: R14.1 3.125,-10.275 5.6,-10.275 U4.1
NetR16_1: R16.1 R18.2 U5.7 | length 2.3
  Top Layer w0.3: U5.7 R16.1@15.275,-14.05
NetR16_2: R16.2 R17.2 R20.1 U5.9 | length 4.1
  Top Layer w0.3: U5.9 15.125,-11.5 15.275,-11.65 R16.2@15.275,-12.55
NetR18_1: R18.1 R21.1 U5.8 | length 3.2
  Top Layer w0.3: U5.8 R18.1 13.751,-12.974 v1(13.751,-13.176) v1@13.626,-13.3
  Bottom Layer w0.3: v1(13.751,-13.176) 14.674,-13.176 R21.1@14.7,-13.15
NetSound1_1: Sound1.1 U1.25 | length 5.5
  Top Layer w0.25: v1(19.652,-11.527) 19.65,-11.525 U1.25
  Bottom Layer w0.25: Sound1.1@18.1,-9.275 18.1,-11.284 18.542,-11.726 19.06,-11.726 19.258,-11.527 v1(19.652,-11.527)
NetU1_32: U1.32 U3.6 | length 23.6
  Top Layer w0.25: U3.6 11.422,-1.05 12.426,-2.054 12.426,-2.875 12.651,-3.1 v1(12.651,-3.25) ; v1(24.526,-12.851) 24.526,-12.724 24.775,-12.475 U1.32
  Bottom Layer w0.25: v1(12.651,-3.25) 12.651,-3.872 13.653,-4.875 14.275,-4.875 15.7,-4.875 16.551,-5.726 16.551,-10.101 17.7,-11.25 17.7,-11.449 19.241,-12.991 24.386,-12.991 v1(24.526,-12.851)
NetU1_33: U1.33 U3.4 | length 26.4
  Top Layer w0.25: v1(9.9,-3.1) 10.051,-2.95 U3.4 ; v1(25.139,-13.439) 25.275,-13.304 U1.33
  Bottom Layer w0.25: v1(9.9,-3.1) 11.525,-3.1 12.251,-3.826 12.251,-4.038 13.488,-5.275 ; 14.441,-5.275 13.488,-5.275 ; v1(25.139,-13.439) 25.103,-13.476 23.325,-13.476 23.24,-13.391 19.076,-13.391 17.3,-11.615 17.3,-11.416 16.151,-10.267 16.151,-5.892 15.534,-5.275 13.488,-5.275
PUMP: C9.2 C10.2 D1.3 R3.1 U5.1 | length 7.3
  Top Layer w0.3: C10.2@7.575,-14.1 U5.1@9.275,-14.1
  Top Layer w0.4: D1.3 4.3,-14.15 ; C9.2@4.625,-14.15 C9.2 7.525,-14.15 C10.2@7.575,-14.1
  Bottom Layer w0.4: v1(6.175,-14.776) 7.076,-14.776 7.101,-14.751 R3.1@7.075,-14.725
VOK: U5.6 U5.10 | length 7
  Top Layer w0.25: U5.10 11.625,-11.1 12.05,-10.675 12.623,-10.675 v1(12.673,-10.625) ; U5.6 12.526,-15.1 v1(12.926,-14.701)
  Bottom Layer w0.25: v1(12.673,-10.625) 12.673,-14.748 12.72,-14.701 v1(12.926,-14.701)
pads on no net: J1.4 T1.2 T1.3 T1.7 T1.8 U1.1 U1.7 U1.10 U1.11 U1.12 U1.15 U1.18 U1.19 U1.20 U1.21 U1.22 U1.30 U1.31 U1.38 U1.46

## Polygon pours and split planes (outlines as drawn)
GND on Bottom Layer "Bottom Layer-No Net" (solid, remove dead copper, pour order 9): 44.625,-22.725 44.65,-7.25 42.5,-7.25 42.5,-0.225 0.325,-0.225 0.275,-0.275 0.275,-16.725 22.125,-16.725 22.275,-16.9 22.275,-18.225 22.35,-18.3 27.025,-18.3 27.6,-18.875 27.6,-22.725
GND on Top Layer "Bottom Layer-No Net" (solid, remove dead copper, pour order 7): 44.7,-22.725 27.15,-22.725 27,-22.6 27,-21.425 28.225,-20.2 34.325,-20.2 34.325,-16.35 35.4,-16.375 35.375,-12.3 31.7,-12.3 31.675,-13.125 30.25,-14.15 27.35,-14.15 24.821,-14.63 24.713,-14.645 22.075,-14.75 21.779,-15.388 21.8,-16.75 0.225,-16.75 0.275,-0.275 0.25,-0.25 42.525,-0.25 42.5,-7.25 44.675,-7.25
GND on Top Layer "Bottom Layer-No Net" (solid, pour order 4): 9.534,-9.725 11.525,-9.725 11.725,-9.925 11.475,-10.6 11.125,-10.999 10.649,-10.999 10.55,-11 9.9,-11.025 9.884,-10.9

## Other copper
Top Layer:
  rectangle net GND: 8.675,-5.575 10.575,-3.825
  rectangle net GND: 4.375,-12.775 7.875,-11.125
  pour cut-out: 27.775,-20.475 27.825,-20.525 30.425,-20.525 30.425,-23.2 28.125,-23.2
  pour cut-out: 8.829,-10.721 13.237,-10.721 13.675,-11.159 13.675,-15.746 11.487,-15.783 8.775,-15.8 8.825,-15.25
  pour cut-out: 9.575,-8.7 9.6,-8.675 12.35,-8.675 12.35,-9.325 12.125,-9.55 9.45,-9.55

## Silkscreen, mask and mechanical layers (free items; w line width, h text height)
Bottom Overlay:
  text "Дозиметр Ультра-Микрон" at 40.325,-1.3 h1.5
  text "ver.3.20" at 33.7,-19 h1.5
  text "Shodan" at 33.75,-20.3 h1.5
  text "Тула 2014г." at 34.65,-21.65 h1.5
Mechanical 1:
  lines w0.2: 42.775,0 0,0 0,-16.95 0.05,-17 21.9,-17 21.9,-23 45,-23 45,-6.875 ; 42.8,0 42.8,-6.875 44.95,-6.875